# Altium PCB touch-tara-h-final.PcbDoc
Units mm, origin at the board's own origin, x right, y up, seen from the top; angles counter-clockwise.
Board outline 151 x 86.38 mm, 2 copper layers (Top Layer, Bottom Layer); 27 components, 28 nets, 73 pads, 0 vias.
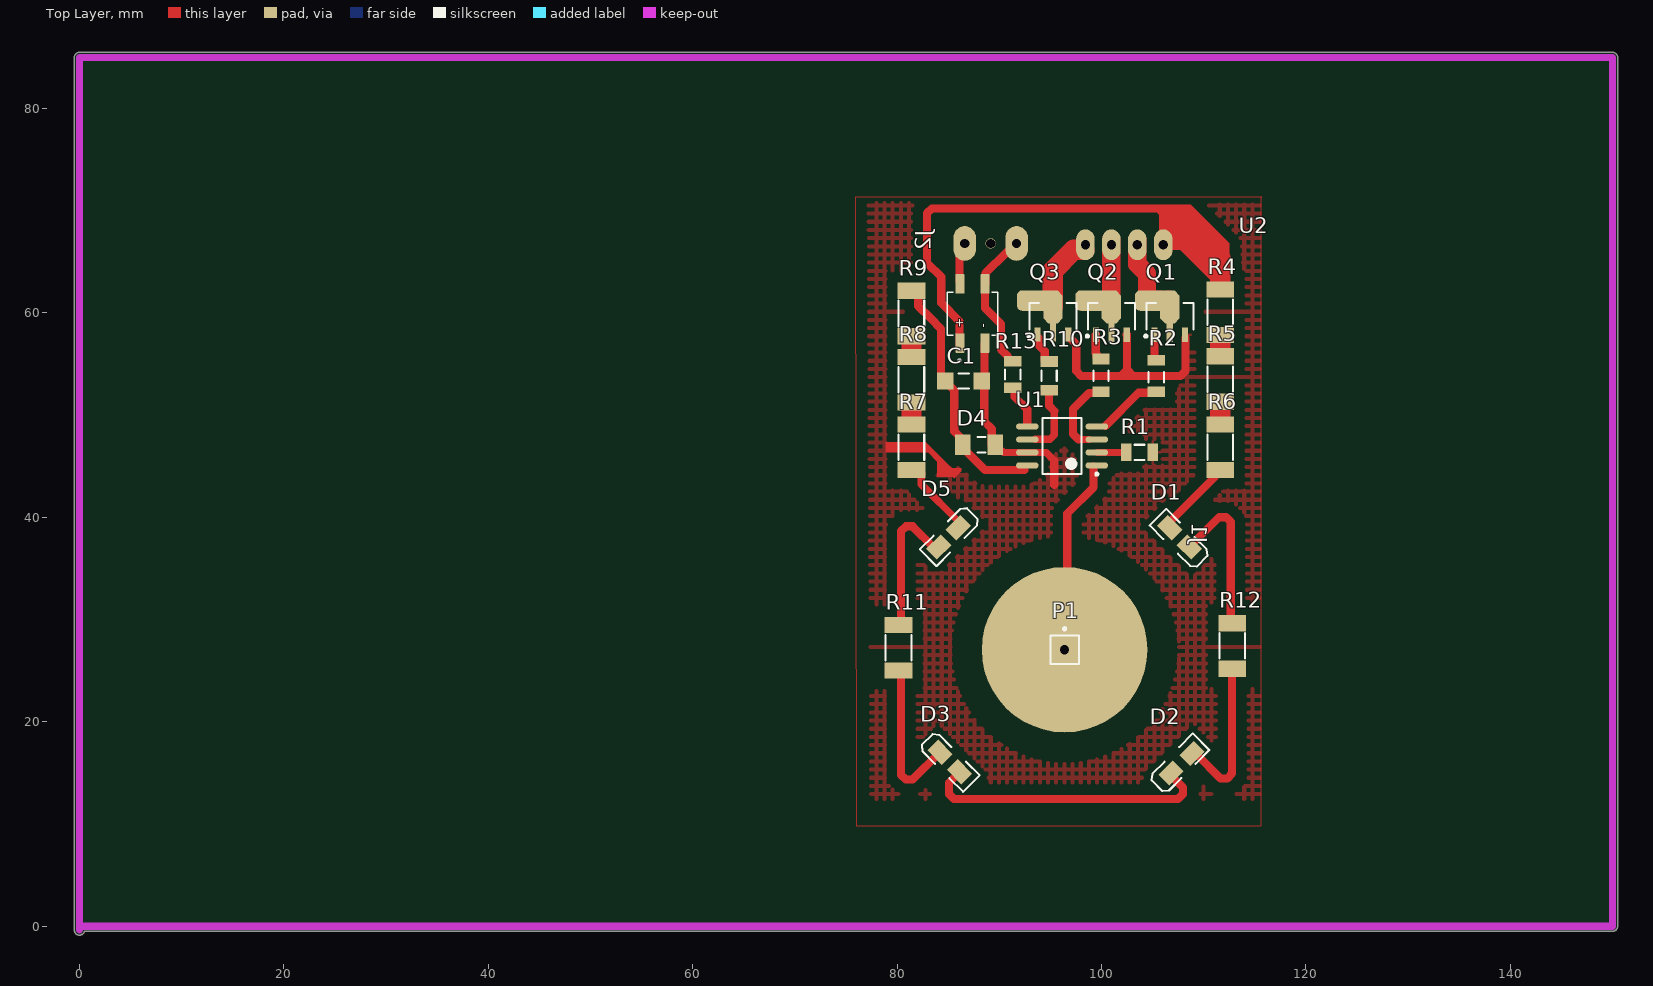
[diagram p0: Top Layer view]
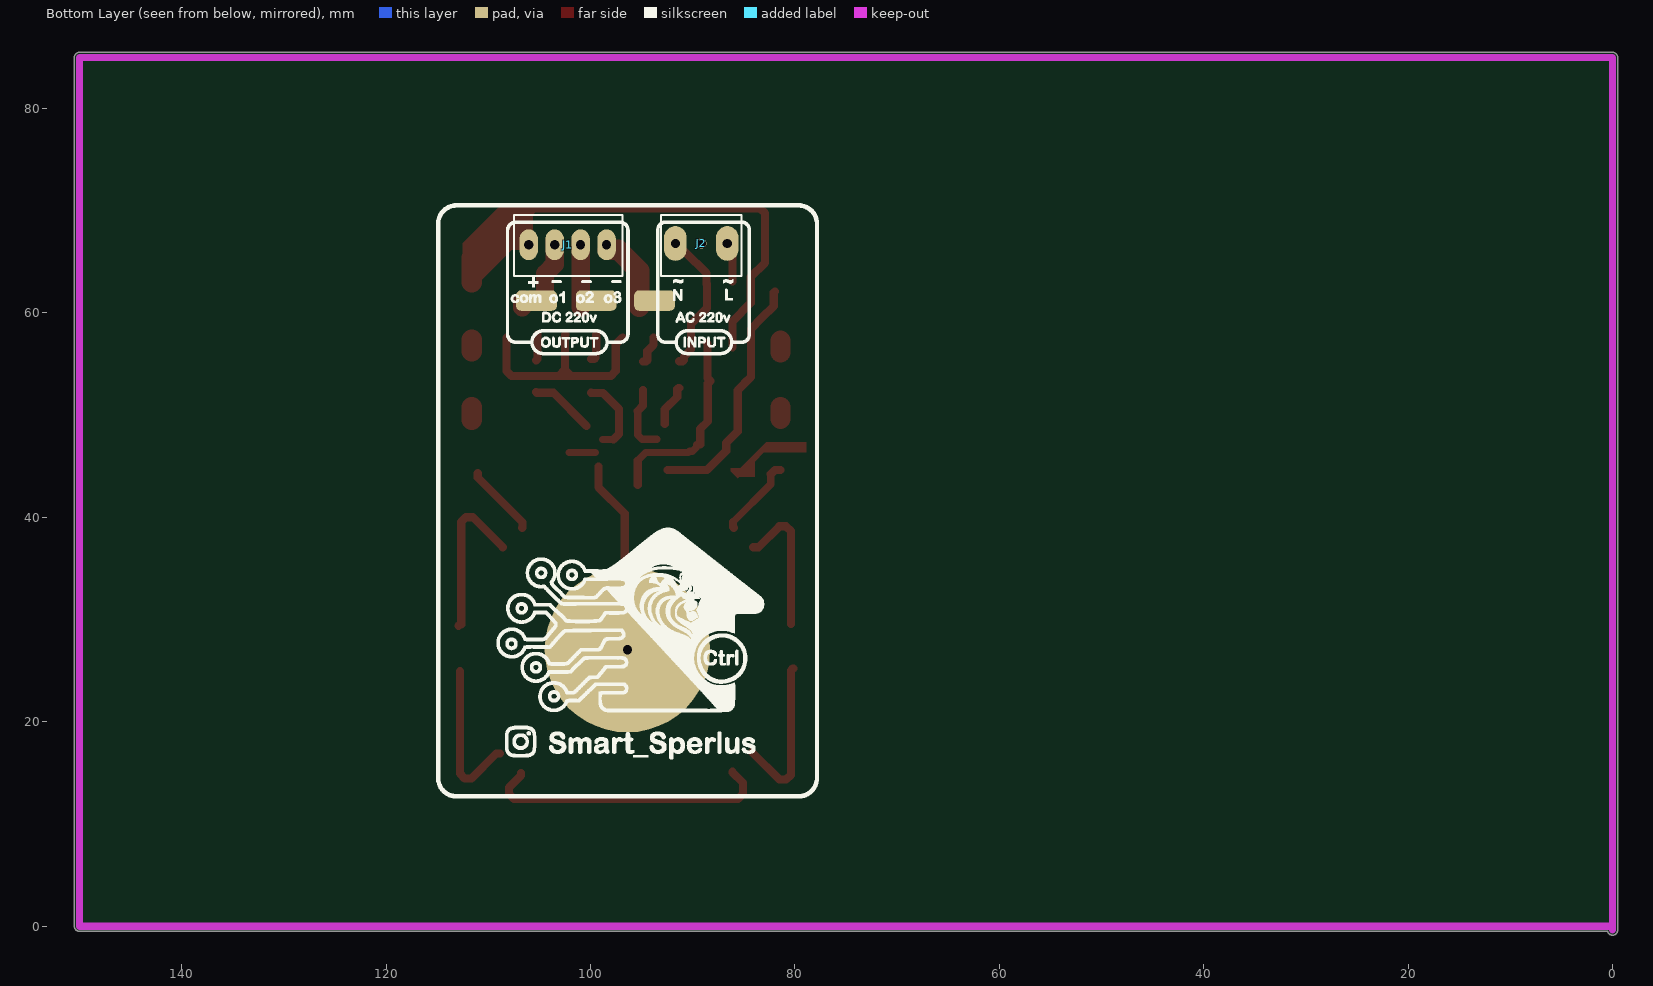
[diagram p1: Bottom Layer view, seen from below]
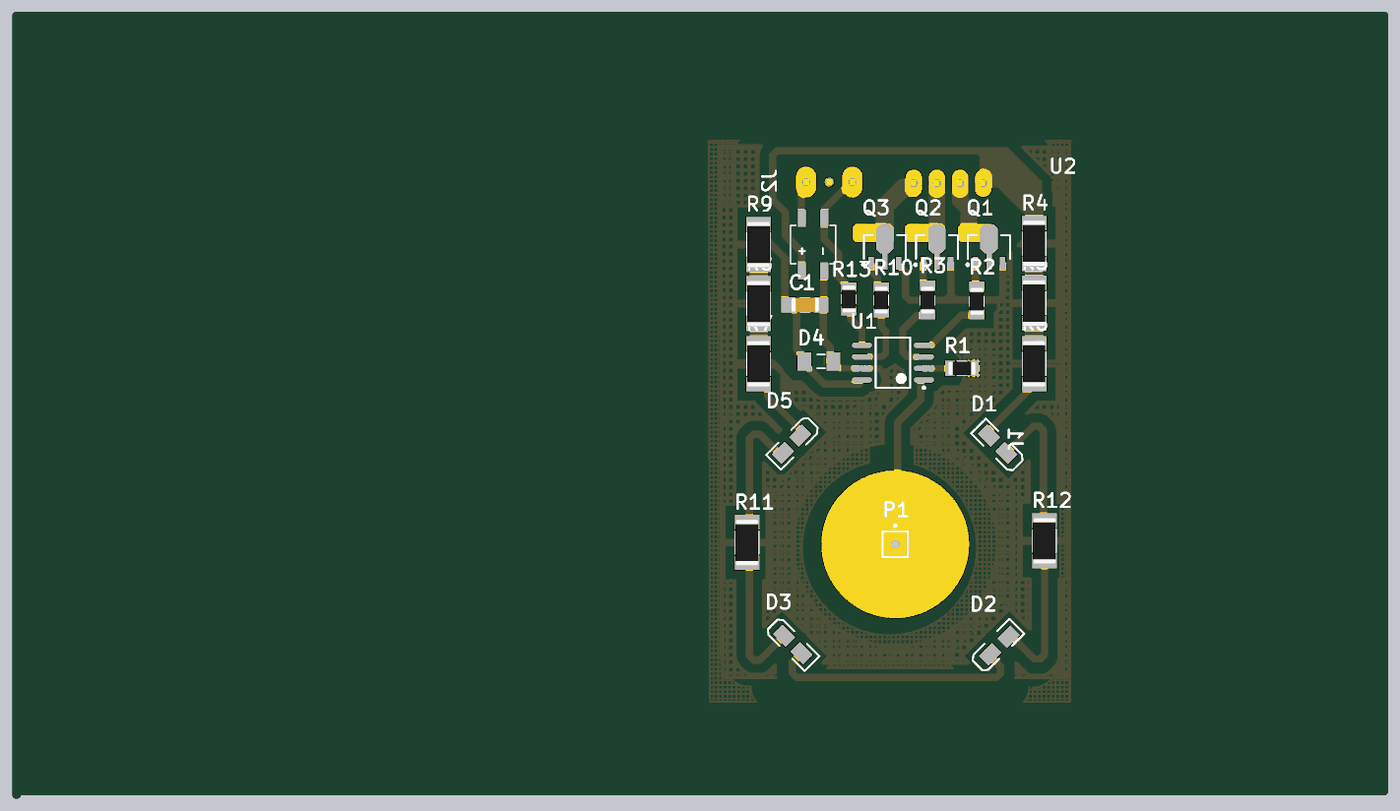
[diagram p2: 3D render of the assembled board from above, using the file's embedded part models]

## Layer stack, top to bottom
Top Solder: solder mask 0.0102, Solder Resist, Dk 3.5
Top Layer: signal copper 0.0356
Dielectric 1: dielectric 0.32, FR-4, Dk 4.8
Bottom Layer: signal copper 0.0356
Bottom Solder: solder mask 0.0102, Solder Resist, Dk 3.5

## Board outline
-0.5,-0.381 -0.5,85 cw(c0,85) 0,85.5 150,85.5 cw(c150,85) 150.5,85 150.5,0 cw(c150,0) 150,-0.5 0.486,-0.5 cw(c0,-0.381)

## Design rules (kind name [scope] priority, off if disabled: settings)
Clearance Clearance_1 [InPolygon] p1: gap=1 ignorepadtopadclearanceinfootprint=FALSE
Clearance [All] p2: gap=0.6 ignorepadtopadclearanceinfootprint=FALSE
PolygonConnect [All] p1: connectstyle=Relief reliefconductorwidth=0.254 reliefentries=4 polygonreliefangle="90 Angle" airgapwidth=0.254
RoomDefinition touch-tara-h [InComponentClass('touch-tara-h')] p1: confinementstyle=ConfineIn formatcopy=TRUE lockcomponents=FALSE outline 144.907,-4.953 247.904,-4.953 247.904,23.114 144.907,23.114
RoutingLayers [All] p1: top layer_v5=FALSE bottom layer_v5=TRUE
RoutingVias [All] p1: holewidth=0.711 width=2.5 viastyle="Through Hole" minholewidth=0.711 minwidth=1.27 maxholewidth=0.711 maxwidth=2
SolderMaskExpansion [All] p1: expansion=0.102 istentingtop=FALSE
Width [All] p1: maxlimit=3 minlimit=0.5 preferedwidth=1
29 further rules are at their usual default settings.

## Components (designator, comment, footprint, x,y, rotation, side; value= is the part's Value field where it differs from the comment)
C1 "=Value" "CAP 1206" 86.487,53.34 r0 top
D1 "LED2" 3.2X1.6X1.1#1 107.569,37.973 r315 top
D2 "LED2" 3.2X1.6X1.1#2 107.696,16.002 r225 top
D3 "LED2" 3.2X1.6X1.1#3 85.217,16.002 r135 top
D4 "Diode" C1206 88.265,47.117 r180 top
D5 "LED2" 3.2X1.6X1.1#4 85.09,38.1 r45 top
J1 "Header4X1" "HEADER 4X1" 106.045,66.675 r180 bottom
J2 "Header3X1" "HEADER 3X1" 86.614,66.802 r0 bottom
P1 "Plug" PIN1 96.393,27.051 r0 top
Q1 "Triac" SOT89N 106.68,59.679 r90 top
Q2 "Triac" SOT89N 100.965,59.679 r90 top
Q3 "Triac" SOT89N 95.25,59.69 r90 top
R1 "10K" "RES 1206 (3216X08L)"#1 103.71,46.355 r0 top
R2 "10K" "RES 1206 (3216X08L)"#2 105.346,53.721 r90 top
R3 "10K" "RES 1206 (3216X08L)"#3 99.949,53.848 r90 top
R4 "10K" "RES 2010 (5026X08L)" 111.633,60.071 r270 top
R5 "10K" "RES 2010 (5026X08L)" 111.633,53.528 r270 top
R6 "10K" "RES 2010 (5026X08L)" 111.633,46.863 r270 top
R7 "10K" "RES 2010 (5026X08L)" 81.407,46.863 r90 top
R8 "10K" "RES 2010 (5026X08L)" 81.407,53.467 r90 top
R9 "10K" "RES 2010 (5026X08L)" 81.407,59.944 r90 top
R10 "10K" "RES 1206 (3216X08L)"#4 94.869,53.848 r90 top
R11 "10K" "RES 2010 (5026X08L)" 80.137,27.244 r90 top
R12 "10K" "RES 2010 (5026X08L)" 112.776,27.432 r270 top
R13 "10K" "RES 1206 (3216X08L)"#1 91.313,53.975 r270 top
U1 "ATtiny15L-1SC" 8S2_N 96.139,46.99 r180 top
U2 "MB6S" SOIC245P670X270-4N 87.376,59.944 r90 top

## Footprints (in the part's own frame and the unit in brackets; to place one, negate y for a bottom-side part, rotate by r counter-clockwise, add the part's x,y. Pads: shape width x height; smd on the part's side, far side on the other; paste and mask are expansions set on the pad)
3.2X1.6X1.1#1 [mm] "SMT LED; 2 Flat Leads"
  rect 2x1.5 smd: 1(-1.347,0.09) 2(1.347,0.09)
  silkscreen extent -2.9,-1.15 3.2,1.15
3.2X1.6X1.1#2 [mm] "SMT LED; 2 Flat Leads"
  rect 2x1.5 smd: 1(-1.437,0.18) 2(1.347,0.09)
  silkscreen extent -2.9,-1.15 3.2,1.15
3.2X1.6X1.1#3 [mm] "SMT LED; 2 Flat Leads"
  rect 2x1.5 smd: 1(-1.257,0) 2(1.437,0)
  silkscreen extent -2.9,-1.15 3.2,1.15
3.2X1.6X1.1#4 [mm] "SMT LED; 2 Flat Leads"
  rect 2x1.5 smd: 1(-1.437,0) 2(1.257,0)
  silkscreen extent -2.9,-1.15 3.2,1.15
8S2_N [mm] "SOP, 8-Leads, Body 5.3x5.3mm, Pitch 1.27mm, IPC Medium Density"
  oval 2.2x0.6 smd: 1(-3.4,1.905) 2(-3.4,0.635) 3(-3.4,-0.635) 4(-3.4,-1.905) 5(3.4,-1.905) 6(3.4,-0.635) 7(3.4,0.635) 8(3.4,1.905)
  silkscreen extent -3.52,-2.75 1.9,2.88, body extent -2.73,-2.75 2.73,2.75, height 2.16
C1206 [mm] "Chip Capacitor, Body 3.2x1.6mm, IPC High Density"
  rect 1.5x2 smd: 1(-1.35,0) 2(1.83,0)
  silkscreen extent -0.4,-0.75 0.4,0.75, body extent -1.7,-0.9 1.7,0.9, height 1.3
"CAP 1206" [mm]
  rect 1.6x1.7 smd: 1(-1.778,0) 2(1.778,0)
  silkscreen extent -0.47,-0.75 0.53,0.75, body extent -1.49,-0.77 1.55,0.75, height 0.75
"HEADER 3X1" [mm]
  oval 2.2x3.4 hole 0.9: 1(0,0) 3(5.08,0)
  round 1 hole 0.9: 2(2.54,0)
  silkscreen extent -1.4,-2.79 6.48,3.17, body extent -1.24,-1.27 6.38,1.27, height 8.38
"HEADER 4X1" [mm]
  oval 1.8x3 hole 0.9: 1(0,0) 2(2.54,0) 3(5.08,0) 4(7.62,0)
  silkscreen extent -1.43,-3.05 9.18,2.92, body extent -1.19,-1.22 8.97,1.32, height 8.38
PIN1 [mm] "Connector; Plug"
  round 16.2 hole 0.9: 1(0,0)
  silkscreen extent -1.4,-1.4 1.4,2.17
"RES 1206 (3216X08L)"#1 [mm] "Chip Resistor, 2-Leads, Body 3.2x1.6mm, IPC High Density _ (0.125 W)"
  rect 1.05x1.7 smd: 1(-1.295,0) 2(1.301,0)
  silkscreen extent -0.5,-0.75 0.5,0.75, body extent -1.52,-0.76 1.53,0.76, height 0.6
"RES 1206 (3216X08L)"#2 [mm] "Chip Resistor, 2-Leads, Body 3.2x1.6mm, IPC High Density _ (0.125 W)"
  rect 1.05x1.7 smd: 1(-1.44,0) 2(1.651,0)
  silkscreen extent -0.5,-0.75 0.5,0.75, body extent -1.52,-0.76 1.53,0.76, height 0.6
"RES 1206 (3216X08L)"#3 [mm] "Chip Resistor, 2-Leads, Body 3.2x1.6mm, IPC High Density _ (0.125 W)"
  rect 1.05x1.7 smd: 1(-1.567,0) 2(1.651,0)
  silkscreen extent -0.5,-0.75 0.5,0.75, body extent -1.52,-0.76 1.53,0.76, height 0.6
"RES 1206 (3216X08L)"#4 [mm] "Chip Resistor, 2-Leads, Body 3.2x1.6mm, IPC High Density _ (0.125 W)"
  rect 1.05x1.7 smd: 1(-1.397,0) 2(1.397,0)
  silkscreen extent -0.5,-0.75 0.5,0.75, body extent -1.52,-0.76 1.53,0.76, height 0.6
"RES 2010 (5026X08L)" [mm] "Chip Resistor, 2-Leads, Body 5.0x2.6mm, IPC High Density _ (0.250 W)"
  rect 1.6x2.7 smd: 1(-2.225,0) 2(2.225,0)
  silkscreen extent -1.25,-1.25 1.25,1.25, body extent -2.54,-1.27 2.54,1.27, height 0.6
SOIC245P670X270-4N [mm]
  rrect23% 1.91x0.91 smd: 1(-2.9,1.225) 2(-2.9,-1.225) 3(2.9,-1.225) 4(2.9,1.225)
  silkscreen extent -4.68,-2.48 2.1,2.48
SOT89N [mm] "SOT89, 3-Leads, Body 4.5x2.4 mm, Pitch 1.5mm, Lead Span 4.1mm, IPC Medium Density"
  rect 1.4x0.6 smd: 1(-1.8,1.5) 3(-1.8,-1.5)
  rect 1.8x0.6 smd: 2(-1.6,0)
  oct 3.2x1.9 smd: 2(0.9,0)
  silkscreen extent -2.07,-2.3 1.3,2.47, body extent -1.3,-2.3 1.3,2.3, height 1.6

## Part data
C1: library part Capacitor, "Capacitor"
D1 D2 D3 D5: "Typical RED, GREEN, YELLOW, AMBER GaAs LED", LatestRevisionDate=17-Jul-2002, LatestRevisionNote="Re-released for DXP Platform.", PackageDescription="SM LED; 2 Flat Leads", PackageReference=3.2X1.6X1.1, PackageVersion=Feb-2002, Published=8-Jun-2000, Publisher="Altium Limited"
D4: "Default Diode", Code_JEDEC=DO-214-AB, LatestRevisionDate=17-Jul-2002, LatestRevisionNote="Re-released for DXP Platform.", PackageDescription="DO-214-AB/SMC; 2 C-Bend Leads; Body 7.9 x 5.9 mm, inc. leads (LxW)", PackageReference=SMC, PackageVersion=Sep-1996, Published=8-Jun-2000, Publisher="Altium Limited"
Q1 Q2 Q3: "Silicon Bidirectional Triode Thyristor", ComponentLink1Description="Manufacturer Link", ComponentLink1URL=http://www.motorola.com/, DatasheetVersion=1999, LatestRevisionDate=17-Jul-2002, LatestRevisionNote="Re-released for DXP Platform.", Note="Pin 2 is electrically connected to Pin 4 (TAB)", PackageDescription="TO, Thru-Hole, Vertical, Heatsink Mounted; 3 In-Line Leads; Pitch 2.28 mm", PackageReference=369-03, Published=29-Sep-2000, Publisher="Altium Limited"
R1 R2 R3 R4 R5 R6 R7 R8 R9 R10 R11 R12 R13: library part Resistor, "Resistor", Power="1/4 W", Tolerance=5%
U1: "8-Bit AVR Microcontroller with 1K Byte of Flash Memory", Supplier Part Number 1=ATTINY15L-1SC-ND, ComponentLink1Description=Datasheet, ComponentLink1URL=http://www.atmel.com/dyn/resources/prod_documents/doc1187.pdf, ComponentLink2Description="Atmel.com Home", ComponentLink2URL=http://www.atmel.com, DatasheetVersion=1187E-AVR-06/02, LatestRevisionDate=16-Oct-2006, LatestRevisionNote="IPC-7351 Footprint Added.", PackageDescription="8-Lead, 0.208\" Body, Plastic Small Outline Package (EIAJ)", PackageReference=8S2, PackageVersion="revF, Apr-2008", Published=17-Sep-2003, Publisher="Altium Limited", Supplier 1=Digi-Key, Supplier 2=Mouser, Supplier Part Number 2=556-ATTINY15L1SC
U2: "Bridge Rectifier Single Phase Standard 600V Surface Mount 4-SOIC", Package="BESOP-4 Surge Components", Digi-Key_Part_Number=MB6SCT-ND, Digi-Key_Purchase_URL=https://www.digikey.com.tr/product-detail/en/on-semiconductor/MB6S/MB6SCT-ND/965654?utm_source=snapeda&utm_medium=aggregator&utm_campaign=symbol, MF="ON Semiconductor", MP=MB6S, SnapEDA_Link=https://www.snapeda.com/parts/MB6S/ON%20Semiconductor/view-part/2774209/?ref=snap
P1: LatestRevisionDate=17-Jul-2002, LatestRevisionNote="Re-released for DXP Platform.", Publisher="Altium Limited"

## Free pads (board coordinates)
  rrect50% 4x2 all layers, no hole: 154(93.726,61.214) 154(99.441,61.214) 155(105.283,61.214)

## Nets (pads, with @x,y where several pads share a name; then routed paths per layer and width w, separated by ;. In a path a pad name is that pad's centre, name@x,y a point inside that pad or via, vN(x,y) a via of type N, cw(c..) or ccw(c..) an arc to the next point about the centre after c; other vN are vias at no path point)
GND: C1.2 D4.1 Q1.3 Q2.3 Q3.3 R1.2 U1.7 U2.2 | length 41.3
  Top Layer w0.7: D4.1 89.615,46.867 90.015,46.467 90.313,46.467 90.425,46.355 U1.7 92.749,46.345 94.588,46.345 95.377,45.556
  Top Layer w0.8: U2.2 88.546,56.989 88.546,53.621 C1.2 88.519,53.086 88.519,49.403 89.265,48.657 D4.1@89.265,47.117 ; 95.377,43.18 95.377,45.556 ; Q3.3@96.85,57.59 97.536,56.904 97.536,54.312 98.005,53.843 101.082,53.843 102.489,53.843 ; Q2.3 102.489,57.855 102.489,53.847 107.735,53.847 108.204,54.316 Q1.3@108.204,57.579
NetD1_1: D1.1 R6.2 | length 7.2
  Top Layer w0.8: D1.1 106.643,39.026 106.643,39.521 111.029,43.908 R6.2@111.029,44.323
NetD1_2: D1.2 R12.1 | length 15.7
  Top Layer w0.8: D1.2 111.518,40.017 112.18,40.017 112.649,39.548 R12.1@112.649,29.53 ; R12.1@112.776,29.53 R12.1@112.903,29.403
NetD2_1: D2.1 R12.2 | length 15.2
  Top Layer w0.8: D2.1 109.22,16.891 111.645,14.466 112.307,14.466 112.776,14.935 R12.2@112.776,24.953
NetD2_2: D2.2 D3.1 | length 28.4
  Top Layer w0.8: D3.1 86.106,15.05 85.09,14.034 85.09,12.915 85.559,12.446 107.493,12.446 107.962,12.915 107.962,13.577 106.807,14.732 D2.2
NetD3_2: D3.2 R11.1 | length 15.7
  Top Layer w0.8: R11.1@80.137,25.207 80.216,25.207 80.391,25.032 80.391,14.808 80.86,14.339 81.522,14.339 D3.2
NetD5_1: D5.1 R11.2 | length 13.8
  Top Layer w0.8: R11.2@80.391,29.578 80.391,38.659 80.86,39.128 81.522,39.128 83.573,37.077 84.067,37.077 D5.1
NetD5_2: D5.2 R7.1 | length 7.9
  Top Layer w0.7: R7.1@82.357,44.238 82.357,43.246 D5.2@86.049,39.554
  Top Layer w0.8: R7.1 81.957,44.638 R7.1@82.357,44.238 ; D5.2 86.049,39.059 D5.2@86.049,39.554
NetJ1_2: J1.2 pad.155 Q1.2 | length 8.5
  Top Layer w1.8: J1.2@103.505,67.183 103.505,64.77 104.455,63.82 104.455,61.314 Q1.2@105.791,61.314 ; Q1.2@106.488,61.279 106.63,61.279 106.68,61.229 Q1.2@106.68,60.579
NetJ1_3: J1.3 pad.154@99.441,61.214 Q2.2 | length 6.6
  Top Layer w1.8: Q2.2@100.965,60.579 J1.3@100.965,67.183
NetJ1_4: J1.4 pad.154@93.726,61.214 Q3.2 | length 7.5
  Top Layer w2: Q3.2@95.25,60.59 95.25,64.135 97.29,66.175 J1.4@98.325,66.175
NetJ2_1: J2.1 U2.4 | length 4.5
  Top Layer w0.8: U2.4@86.096,63.08 J2.1@86.096,67.537
NetJ2_3: J2.3 R13.1 U2.3 | length 14.7
  Top Layer w0.8: U2.3 88.601,62.399 88.601,60.497 90.17,58.928 90.17,56.413 90.863,55.72 90.863,55.395 90.988,55.27 R13.1 ; U2.3@88.656,62.844 88.656,63.891 90.699,65.934 91.047,65.934 91.454,66.34 J2.3@91.454,67.324
NetP1_1: P1.1 U1.1 | length 18
  Top Layer w0.8: P1.1@96.647,28.067 96.647,40.386 99.203,42.942 U1.1@99.203,44.985
NetQ1_3: Q1.1 R2.2 | length 2.6
  Top Layer w0.8: Q1.1 105.18,55.497 105.305,55.372 R2.2
NetQ2_3: Q2.1 R3.2 | length 2.8
  Top Layer w0.8: Q2.1 99.441,57.855 99.441,56.093 99.499,56.035 99.499,55.624 99.624,55.499 R3.2
NetQ3_3: Q3.1 R10.2 | length 2.9
  Top Layer w0.8: Q3.1@93.841,57.59 93.841,56.885 94.439,56.287 94.439,55.37 94.564,55.245 R10.2
NetR4_2: R4.2 R5.1 | length 1.1
  Top Layer w2: R5.1@111.633,56.261 R4.2@111.633,57.404
NetR5_2: R5.2 R6.1 | length 1.3
  Top Layer w2: R6.1@111.633,49.53 R5.2@111.633,50.8
NetR7_2: R7.2 R8.1 | length 1.1
  Top Layer w2: R7.2@81.407,49.657 R8.1@81.407,50.8
NetR8_2: R8.2 R9.1 | length 1.1
  Top Layer w2: R8.2@81.407,56.134 R9.1@81.407,57.277
o1: R1.1 U1.2 | length 2.6
  Top Layer w0.7: U1.2 R1.1@102.11,46.355
o2: R2.1 U1.4 | length 6.3
  Top Layer w0.8: U1.4@100.391,48.956 103.632,52.197 105.262,52.197 R2.1
o3: R3.1 U1.3 | length 7.7
  Top Layer w0.7: 97.751,47.625 U1.3@98.839,47.625
  Top Layer w0.8: 97.751,47.625 97.223,48.153 97.223,50.614 98.765,52.156 99.908,52.156 R3.1@99.949,52.197
o4: R10.1 U1.6 | length 6.7
  Top Layer w0.7: U1.6@93.489,47.645 94.967,47.645 95.377,48.055 95.377,50.419
  Top Layer w0.8: R10.1 94.869,50.927 95.377,50.419
o5: R13.2 U1.5 | length 4.2
  Top Layer w0.8: R13.2 91.384,52.674 91.509,52.549 91.509,51.787 92.739,50.557 U1.5@92.739,49.149
vcc: C1.1 D4.2 R9.2 U1.8 | length 24.5
  Top Layer w0.8: R9.2@81.949,62.109 82.064,61.994 82.064,60.684 83.254,59.494 84.309,58.439 84.309,53.74 C1.1@84.963,53.086 ; C1.1 84.709,53.29 85.109,52.89 85.129,52.89 85.598,52.421 85.598,48.404 86.725,47.277 86.725,46.498 88.595,44.628 92.456,44.628
VDD: J1.1 R4.1 U2.1 | length 53.4
  Top Layer w0.8: U2.1@86.106,56.645 86.106,59.182 84.328,60.96 84.328,63.51 82.931,64.907 82.931,69.762 83.4,70.231 106.807,70.231 111.633,65.405
  Top Layer w2: J1.1@106.934,67.183 108.077,67.183 111.283,63.977 ; R4.1@111.633,62.992 111.633,63.977 111.633,65.405
pads on no net: J2.2

## Polygon pours and split planes (outlines as drawn)
GND on Top Layer "GND_L01_P051" (hatched 90Degree grid 0.8 track 0.4, pour order 51): 77.216,70.739 82.804,70.739 82.423,70.358 82.423,47.752 85.362,44.813 85.507,44.958 94.107,44.958 96.901,47.752 97.028,47.625 99.539,47.625 103.476,51.562 105.918,51.562 106.299,51.943 106.934,51.943 107.735,52.744 107.735,53.847 108.331,54.443 108.331,58.039 108.204,58.166 110.363,60.325 111.125,60.325 111.125,62.23 111.633,62.738 111.252,63.119 111.252,67.056 107.696,70.612 115.443,70.612 115.443,12.446 77.47,12.446
GND on Top Layer "NONET_L01_P024" (hatched 90Degree grid 0.5 track 0.2, shelved, pour order 24): 75.946,71.374 115.697,71.374 115.57,71.247 115.57,9.779 76.073,9.779

## Keep-outs
Keep-Out Layer:
  lines w0.7: 0,-0.381 0,85 150,85 150,0 0,0

## Other copper
Top Layer:
  region net VDD: 105.334,70.612 108.712,70.612 112.522,66.802 112.522,64.77 109.982,64.77 109.855,64.643 107.95,66.548 107.95,66.802 105.664,66.802 105.537,66.929 105.664,67.056 105.664,69.596 105.029,70.231
  region net GND: 78.867,47.371 82.804,47.371 85.362,44.813 86.274,44.813 86.274,44.491 85.598,43.815 85.442,43.971 83.957,43.971 83.947,43.981 83.947,45.466 83.058,46.355 78.867,46.355
  region net GND: 102.108,54.61 101.473,53.975 101.473,53.721 102.489,53.721 102.743,53.975 103.505,53.975 102.616,54.864

## Silkscreen, mask and mechanical layers (free items; w line width, h text height)
Bottom Overlay:
  drawing of 14186 lines, arcs and shapes, not listed
Bottom Solder:
  lines w0.2: 76.454,11.557 76.454,71.374 116.332,71.374 116.332,11.557 76.454,11.557

## Text inside footprints (layer, text, board x,y; h text height)
U2: Top Overlay "+" at 86.486,58.545 h0.81 r90; Top Overlay "-" at 88.776,58.544 h0.81 r90